# EAGLE board eDNA-SingleBoard-V3 (EAGLE 9.6.2)
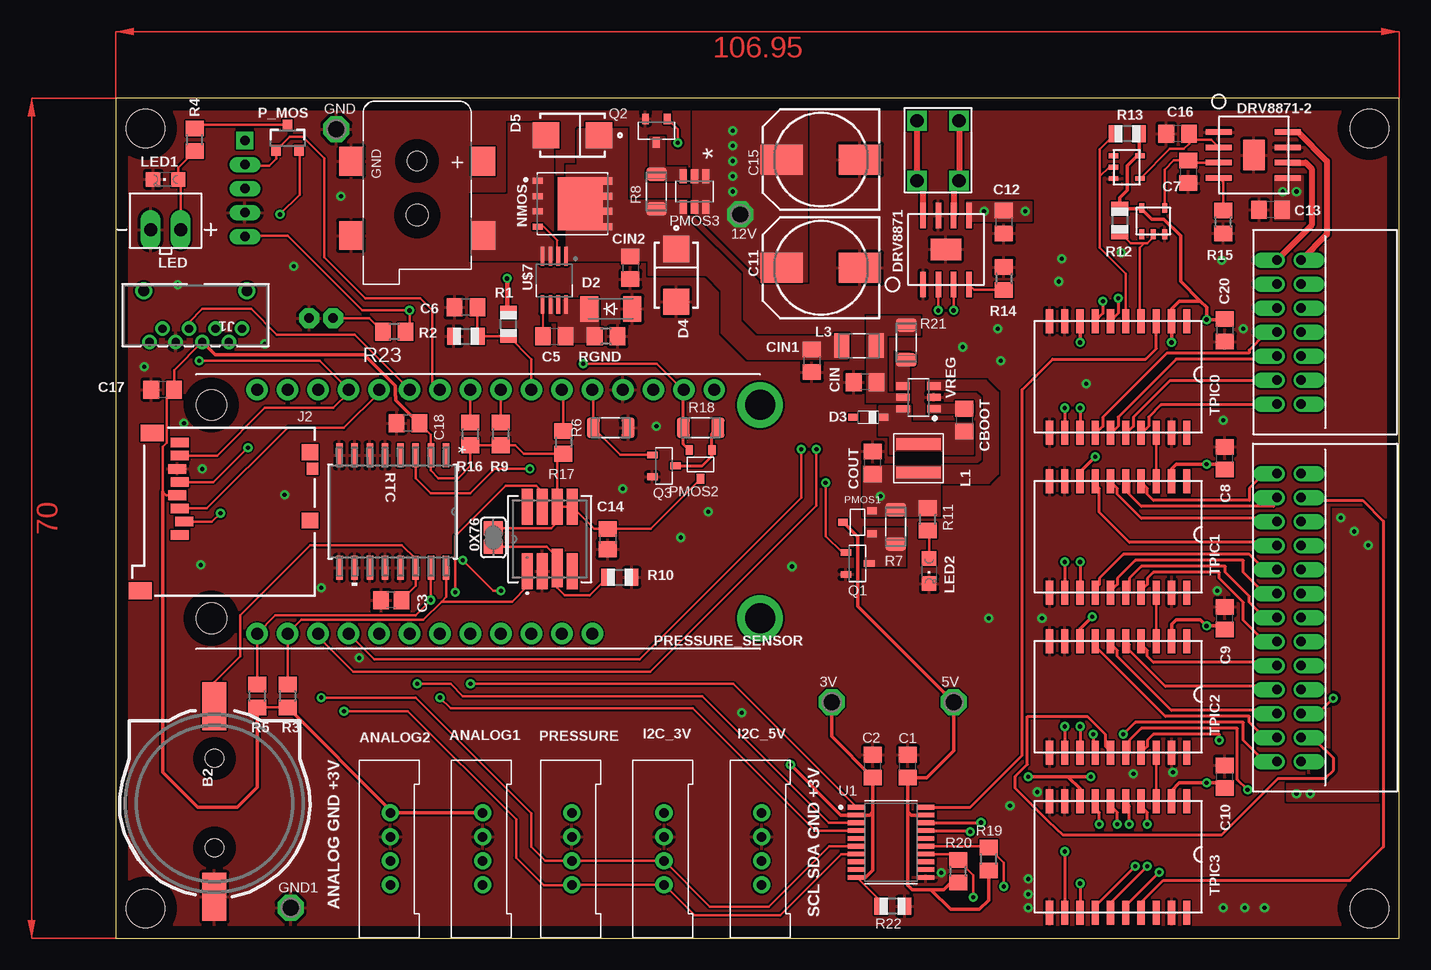
[diagram p0: board, top side]
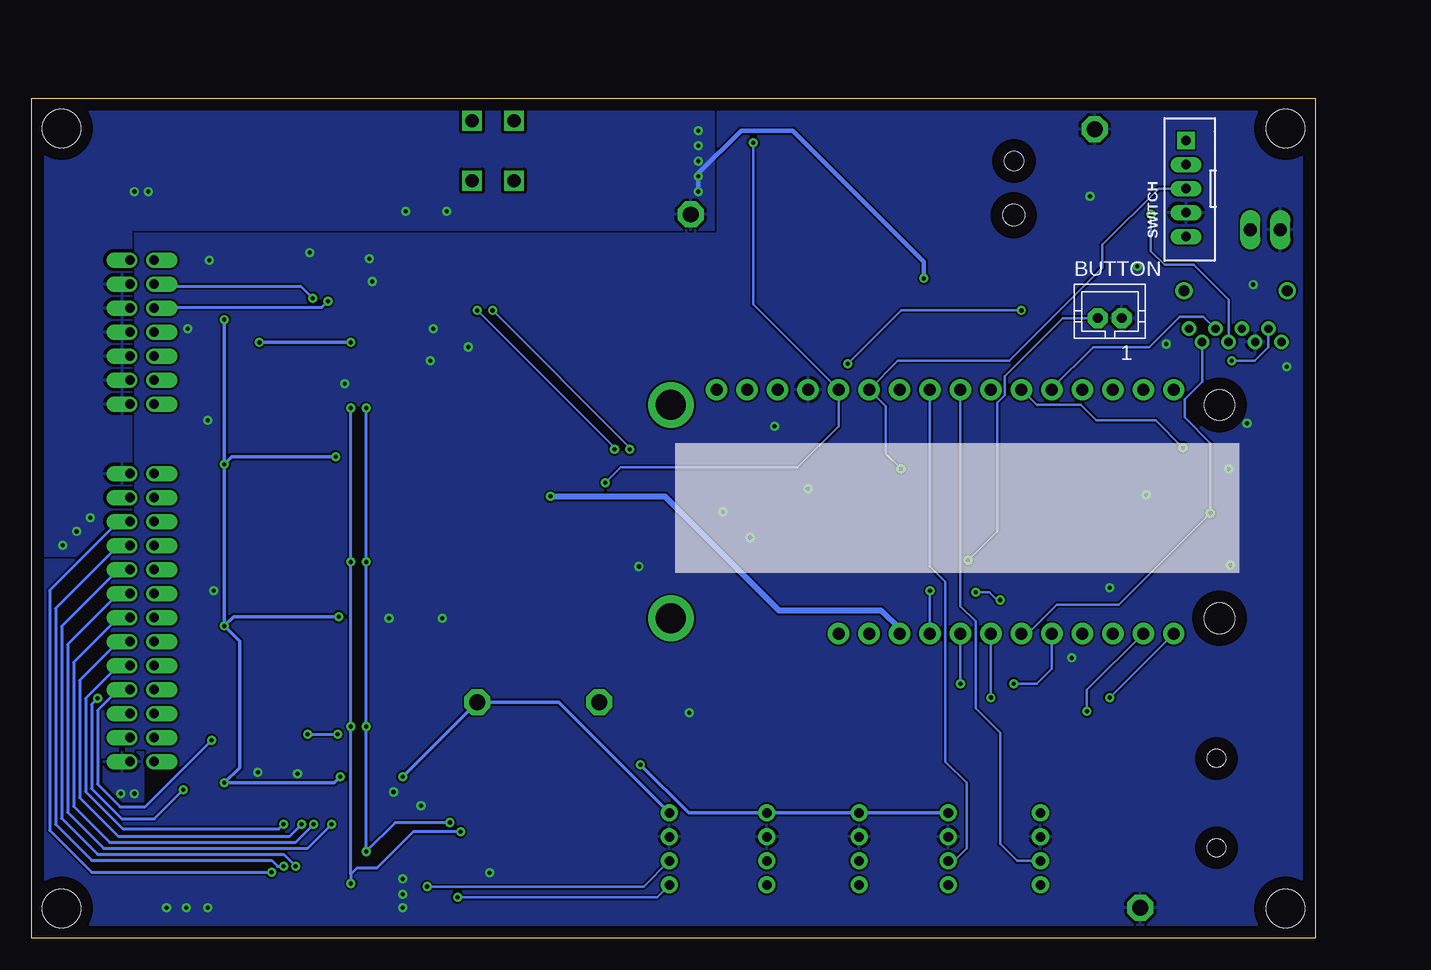
[diagram p1: board, bottom side, seen from below]

Size 106.95 x 70 mm. Coordinates in mm from the lower left corner, seen from the top.
Outline: 0,0 106.95,0 106.95,70 0,70 0,0
Copper layers (1*16): Top 0.035mm / dielectric 1.5mm / Bottom 0.035mm
Design rules "default *": minimum track width 6mil, minimum drill 0.35mm, track to track 6mil, track to pad 6mil, pad to pad 6mil, via to via 6mil, smd to smd 6mil, copper to edge 40mil, drill to drill 6mil, minimum pad ring 10mil, minimum via ring 8mil, stop-mask expansion 4mil, vias tented up to drill 35mil, thermal gap 10mil
Net classes: 1 12v: width 0.356 mm, clearance 0.254 mm; 2 HIGHVOLTAGE: clearance 0.3 mm; 3 sig: width 0.152 mm, clearance 0.2 mm
Holes 3.2 mm at 2.45,2.5 2.45,67.5 104.45,67.5 104.45,2.5

## Footprints (pad centres in the part's own frame; a part is rotated, then mirrored left to right if it is on the bottom)
SJ = smd 1.168 x 1.6: 1 -0.762,0; 2 0.762,0
P1-13 = drill 1.321 pad 2.159 octagon: TP 0,0
DCJACK_2MM_SMT = smd 2.4 x 2: GND 0,-5.5; GNDBREAK 6.2,-5.5; PWR1 0,5.5; PWR2 6.2,5.5 | hole 1.6: 0,0 | hole 1.8: 4.5,0
DF51-4POS = drill 0.8 pad 1.422: P$1 4.4,0; P$2 6.4,0; P$3 8.4,0; P$4 10.4,0
CR1220-2 = smd 4 x 2: + 8.29,0; - -7.6,0 | hole 1.5: 3.95,0; -3.5,0
JST-PH2 = drill 0.813 pad 1.676 octagon: 1 1,0; 2 -1,0
C0805 = smd 1.3 x 1.5: 1 -0.95,0; 2 0.95,0
C0805' = smd 1.3 x 1.5: 1 -0.85,0; 2 0.85,0
140CLH-0810 = smd 3.5 x 2.5: + 3.25,0; - -3.25,0
SOD-123_MINI-SMA = smd 1.5 x 2.1: A 1.8,0; C -1.8,0
SOD323_ST = smd 0.8 x 0.6: A 1.25,0; C -1.25,0
DO_214 = smd 2.2 x 2.15: A 2.2,0; C -2.2,0
SOP8 = smd 2.15 x 0.45: 1 -2.54,1.27; 2 -2.54,0; 3 -2.54,-1.27; 4 -2.54,-2.54; 5 3.21,-2.54; 6 3.21,-1.27; 7 3.21,0; 8 3.21,1.27 | smd 1.79 x 2.541: GND 0.381,-0.635
CONN_PJS008U-3000-0_YAM = drill 0.7 pad 1.1: 1 0,0; 2 1.092,1.092; 3 2.21,0; 4 3.302,1.092; 5 4.394,0; 6 5.512,1.092; 7 6.604,0; 8 7.696,1.092 | drill 0.9 pad 1.422: 9 -0.42,-3.175; 11 8.18,-3.175
GCT_MEM2051-00-195-00-A = smd 0.8 x 1.5: 1 1.94,-3.66; 2 0.84,-3.26; 3 -0.26,-3.66; 4 -1.36,-3.86; 5 -2.46,-3.66; 6 -3.56,-3.86; 7 -4.66,-3.66; 8 -5.76,-3.66 | smd 1 x 0.95: 9 -3.56,7.425 | smd 1.3 x 1.4: P1 -4.95,7.2; P2 0.75,7.2 | smd 1.4 x 1.9: P3 6.6,-6.95; P4 -6.55,-5.95
WE-MAPI_40XX = smd 0.98 x 3.7: 1 -1.185,0; 2 1.185,0
INDC3218X200N = smd 1.24 x 2.02: 1 -1.44,0; 2 1.44,0
JST_2POS_2.5MM_UP = drill 1.1 long: 1 -1.25,0; 2 1.25,0
CHIPLED_0805 = smd 1.2 x 1.2: A 0,-1.05; C 0,1.05
FEATHERWING = drill 1 pad 1.778: 1 6.35,1.27; 2 8.89,1.27; 3 11.43,1.27; 4 13.97,1.27; 5 16.51,1.27; 6 19.05,1.27; 7 21.59,1.27; 8 24.13,1.27; 9 26.67,1.27; 10 29.21,1.27; 11 31.75,1.27; 12 34.29,1.27; 13 36.83,1.27; 14 39.37,1.27; 15 41.91,1.27; 16 44.45,1.27; 17 44.45,21.59; 18 41.91,21.59; 19 39.37,21.59; 20 36.83,21.59; 21 34.29,21.59; 22 31.75,21.59; 23 29.21,21.59; 24 26.67,21.59; 25 24.13,21.59; 26 21.59,21.59; 27 19.05,21.59; 28 16.51,21.59 | drill 2.5 pad 3.81: P$1 2.54,20.32; P$2 2.54,2.54 | hole 2.54: 48.26,20.32; 48.26,2.54
8-POWERTDFN = smd 0.85 x 0.5: 1 -2.9,1.905; 2 -2.9,0.635; 3 -2.9,-0.635; 4 -2.9,-1.905 | smd 0.8 x 0.6: 5 2.925,-1.905; 6 2.925,-0.635; 7 2.925,0.635; 8 2.925,1.905 | smd 3.75 x 4.41: 9 0.65,0
SOT753 = smd 0.8 x 0.4: 1 -1.14,0.95; 2 -1.14,0; 3 -1.14,-0.95; 4 1.06,-0.95; 5 1.06,0.95
SOT23-3 = smd 0.8 x 0.9: 1 -0.95,-1; 2 0.95,-1; 3 0,1.1
SOT-23-3 = smd 0.8 x 0.6: D 1.2,0; G -1.2,0.95; S -1.2,-0.95
SOT23-6 = smd 1.146 x 0.597: 1 -1.287,0.95; 2 -1.287,0; 3 -1.287,-0.95; 4 1.287,-0.95; 5 1.287,0; 6 1.287,0.95
MS5803-02BA01 = smd 3 x 0.889: 1 -2.675,1.875; 2 -2.675,0.625; 4 -2.675,-1.875; 5 2.675,-1.875; 6 2.675,-0.625; 7 2.675,0.625; 8 2.675,1.875 | smd 3.2 x 0.889: 3 -2.408,-0.625
SOT23-S = smd 0.88 x 0.569: 1 -0.975,0.915; 2 -0.975,-0.915; 3 0.975,0
R0805 = smd 1.1 x 1.4: 1 -1,0; 2 1,0
R0805' = smd 1.3 x 1.5: 1 -0.95,0; 2 0.95,0
RES_1206 = smd 1.08 x 1.68: 1 -1.445,0; 2 1.445,0
21-0042B_16 = smd 1.981 x 0.533: 1 -4.686,4.445; 2 -4.686,3.175; 3 -4.686,1.905; 4 -4.686,0.635; 5 -4.686,-0.635; 6 -4.686,-1.905; 7 -4.686,-3.175; 8 -4.686,-4.445; 9 4.686,-4.445; 10 4.686,-3.175; 11 4.686,-1.905; 12 4.686,-0.635; 13 4.686,0.635; 14 4.686,1.905; 15 4.686,3.175; 16 4.686,4.445
2MM_5POS_HEADER = drill 0.8 pad 1.422 square: 1 -4,0 | drill 0.8 long: 2 -2,0; 3 0,0; 4 2,0; 5 4,0
DIP20 = smd 2 x 0.6: 1 -3.81,5.08; 2 -3.81,3.81; 3 -3.81,2.54; 4 -3.81,1.27; 5 -3.81,0; 6 -3.81,-1.27; 7 -3.81,-2.54; 8 -3.81,-3.81; 9 -3.81,-5.08; 10 -3.81,-6.35; 11 5.49,-6.35; 12 5.49,-5.08; 13 5.49,-3.81; 14 5.49,-2.54; 15 5.49,-1.27; 16 5.49,0; 17 5.49,1.27; 18 5.49,2.54; 19 5.49,3.81; 20 5.49,5.08
SOP65P640X120-20N = smd 1.57 x 0.41: 1 -2.87,2.925; 2 -2.87,2.275; 3 -2.87,1.625; 4 -2.87,0.975; 5 -2.87,0.325; 6 -2.87,-0.325; 7 -2.87,-0.975; 8 -2.87,-1.625; 9 -2.87,-2.275; 10 -2.87,-2.925; 11 2.87,-2.925; 12 2.87,-2.275; 13 2.87,-1.625; 14 2.87,-0.975; 15 2.87,-0.325; 16 2.87,0.325; 17 2.87,0.975; 18 2.87,1.625; 19 2.87,2.275; 20 2.87,2.925
3.5MM_DIP2 = drill 1.1 square: 1 -1.778,2.611; 2 -1.778,-2.389; 3 1.722,-2.389; 4 1.722,2.611
DF51K-26DP-2DS-ANGLE = drill 0.8 pad 1.118 offset: 1 0,-2; 2 2,-2; 3 4,-2; 4 6,-2; 5 8,-2; 6 10,-2; 7 12,-2; 8 14,-2; 9 16,-2; 10 18,-2; 11 20,-2; 12 22,-2; 13 24,-2; 14 24,0; 15 22,0; 16 20,0; 17 18,0; 18 16,0; 19 14,0; 20 12,0; 21 10,0; 22 8,0; 23 6,0; 24 4,0; 25 2,0; 26 0,0
DF51K-14DP-2DS-ANGLE = drill 0.8 pad 1.118 offset: 1 0,-2; 2 2,-2; 3 4,-2; 4 6,-2; 5 8,-2; 6 10,-2; 7 12,-2; 8 12,0; 9 10,0; 10 8,0; 11 6,0; 12 4,0; 13 2,0; 14 0,0
SOP65P640X120-8N = smd 1.57 x 0.41: 1 -2.87,0.975; 2 -2.87,0.325; 3 -2.87,-0.325; 4 -2.87,-0.975; 5 1.17,-0.975; 6 1.17,-0.325; 7 1.17,0.325; 8 1.17,0.975
SOT23-6@1 = smd 1.146 x 0.597: 1 -1.287,0.95; 2 -1.287,0; 3 -1.287,-0.95; 4 1.287,-0.95; 5 1.287,0; 6 1.287,0.95

## Placement (x,y rotation side)
0X76  [SJ]  31.45,33.4 90 top
3V  TPPAD1-13  [P1-13]  59.64,19.68 0 top
5V  TPPAD1-13  [P1-13]  69.8,19.68 0 top
12V  TPPAD1-13  [P1-13]  52.02,60.33 0 top
12V_IN  2.1MMJACKSMT  [DCJACK_2MM_SMT]  25.1,64.77 270 top
ANALOG1  DF51-4POS  [DF51-4POS]  30.56,14.86 270 top
ANALOG2  DF51-4POS  [DF51-4POS]  22.88,14.86 270 top
B2  cr1220  [CR1220-2]  8.21,11.05 90 top
BUTTON  [JST-PH2]  17.1,51.69 0 bottom
C1  100nF  [C0805]  65.99,14.35 90 top
C2  100nF  [C0805]  63.07,14.35 90 top
C3  0.1uF  [C0805']  22.94,28.19 180 top
C5  100nF  [C0805]  36.53,50.16 0 top
C6  100nF  [C0805]  29.16,52.58 180 top
C7  150pF  [C0805]  89.36,63.88 270 top
C8  100nF  [C0805]  92.41,40.01 90 top
C9  100nF  [C0805]  92.41,26.67 90 top
C10  100nF  [C0805]  92.41,13.46 90 top
C11  470uF  [140CLH-0810]  58.76,55.88 180 top
C12  100nF  [C0805]  73.99,59.69 270 top
C13  100nF  [C0805]  96.22,60.71 180 top
C14  100nF  [C0805']  40.98,33.27 270 top
C15  470uF  [140CLH-0810]  58.76,64.9 180 top
C16  150pF  [C0805]  88.47,67.06 180 top
C17  100nF  [C0805]  3.89,45.72 180 top
C18  100nF  [C0805]  24.34,42.93 180 top
C20  100nF  [C0805]  92.41,50.67 270 top
CBOOT  100nF  [C0805]  70.69,43.18 270 top
CIN  10uF  [C0805]  62.44,46.35 180 top
CIN1  10uF  [C0805]  57.99,48.13 270 top
CIN2  10uF  [C0805]  42.88,55.88 270 top
COUT  47uF  [C0805]  63.07,39.62 90 top
D2  1N4148W  [SOD-123_MINI-SMA]  41.23,52.45 0 top
D3  NSR0320MW2T1G  [SOD323_ST]  62.69,43.43 180 top
D4  SMAJ60A  [DO_214]  46.69,55.24 270 top
D5  SMAJ60A  [DO_214]  38.05,66.93 180 top
DRV8871  Motor H-Bridge  [SOP8]  68.53,57.02 90 top
DRV8871-2  Latch H  [SOP8]  94.44,65.91 0 top
GND  TPPAD1-13  [P1-13]  18.37,67.44 0 top
GND1  TPPAD1-13  [P1-13]  14.56,2.54 0 top
I2C_3V  DF51-4POS  [DF51-4POS]  45.67,14.86 270 top
I2C_5V  DF51-4POS  [DF51-4POS]  53.8,14.86 270 top
J1  PJS008U-3000-0  [CONN_PJS008U-3000-0_YAM]  10.5,50.8 180 top
J2  MEM2051-00-195-00-A  [GCT_MEM2051-00-195-00-A]  8.97,35.56 270 top
L1  10UH 2.7A  [WE-MAPI_40XX]  66.88,40.01 270 top
L3  LB3218T1R0M  [INDC3218X200N]  61.93,49.4 0 top
LED  2.5MM_JST_UP_2POS  [JST_2POS_2.5MM_UP]  4.14,59.05 0 top
LED1  Yellow  [CHIPLED_0805]  4.14,63.25 90 top
LED2  RED  [CHIPLED_0805]  67.77,30.61 180 top
MS1  FEATHERWING  [FEATHERWING]  56.22,46.99 180 top
NMOS  FDMS86101  [8-POWERTDFN]  38.05,61.21 0 top
NOTGATE1  [SOT753]  86.44,59.82 90 top
NOTGATE2  [SOT753]  84.28,64.26 0 top
P_MOS  130mA/20V  [SOT23-3]  14.31,66.67 0 top
PMOS1  DMP3099L-7  [SOT-23-3]  61.8,34.67 180 top
PMOS2  DMP3099L-7  [SOT-23-3]  48.72,39.5 270 top
PMOS3  DMP3056LDM-7  [SOT23-6]  48.21,62.23 270 top
PRESSURE  DF51-4POS  [DF51-4POS]  37.99,14.86 270 top
PRESSURE_SENSOR  MS580302BA01-00  [MS5803-02BA01]  36.15,33.27 90 top
Q1  DMN65D8L-7  [SOT23-S]  61.8,31.24 0 top
Q2  DMN65D8L-7  [SOT23-S]  45.04,67.31 270 top
Q3  DMN65D8L-7  [SOT23-S]  45.67,39.37 0 top
R1  1M  [R0805]  32.72,51.18 90 top
R2  300k  [R0805]  29.16,50.16 0 top
R3  10K  [R0805']  14.31,20.19 270 top
R4  3k  [R0805']  6.56,66.55 90 top
R5  10K  [R0805']  11.77,20.19 270 top
R6  30k  [RES_1206]  41.23,42.55 0 top
R7  100k  [RES_1206]  64.98,34.29 90 top
R8  100k  [RES_1206]  45.04,62.23 270 top
R9  10K  [R0805']  32.09,42.04 90 top
R10  30K  [R0805]  41.99,30.1 0 top
R11  6.2k  [R0805']  67.64,34.92 90 top
R12  20K  [R0805]  83.65,59.82 270 top
R13  20K  [R0805]  84.28,67.06 180 top
R14  32K  [R0805']  73.99,54.99 270 top
R15  32K  [R0805']  92.28,59.69 90 top
R16  10K  [R0805']  29.55,42.04 90 top
R17  10K  [R0805']  37.29,41.34 270 top
R18  30k  [RES_1206]  48.72,42.55 180 top
R19  10K  [R0805']  72.72,6.6 90 top
R20  10K  [R0805']  70.18,5.59 90 top
R21  100k  [RES_1206]  65.87,49.66 90 top
R22  10K  [R0805]  64.72,2.67 180 top
R23  10K  [R0805']  23.2,50.55 180 top
RGND  1K  [R0805']  40.85,50.16 180 top
RTC  DS3231SNT&R  [21-0042B_16]  23.07,35.56 270 top
SWITCH  2MM_JST_PH_5POS  [2MM_5POS_HEADER]  10.75,62.48 270 bottom
TPIC0  TPIC6B596  [DIP20]  84.15,47.62 270 top
TPIC1  TPIC6B596  [DIP20]  84.15,34.29 270 top
TPIC2  TPIC6B596  [DIP20]  84.15,20.95 270 top
TPIC3  TPIC6B596  [DIP20]  84.15,7.62 270 top
U1  TXS0108EPWR  [SOP65P640X120-20N]  64.6,8 0 top
U$2  Motor Push In  [3.5MM_DIP2]  68.53,65.53 0 top
U$4  DF51K-26DP-2DS  [DF51K-26DP-2DS-ANGLE]  98.76,38.73 270 top
U$5  DF51K-14DP-2DS  [DF51K-14DP-2DS-ANGLE]  98.76,56.52 270 top
U$7  LTC4372  [SOP65P640X120-8N]  36.53,53.98 270 top
VREG  BUCK_REGULATORS  [SOT23-6@1]  66.88,45.09 180 top

## Library data of the parts
0X76 = jumper
3V 5V 12V GND GND1 = testpad
12V_IN C3 C11 C14 C15 LED1 LED2 MS1 R1 R2 R10 R12 R13 R22 = adafruit
ANALOG1 ANALOG2 I2C_3V I2C_5V PRESSURE = HiroseConnectors
B2 = microbuilder
BUTTON = jst-ph
C1 C2 C5-C10 C12 C13 C16-C18 C20 R4 R11 = resistor
CBOOT CIN CIN1 CIN2 COUT = rcl; SPICEPREFIX: C
D2 D4 D5 NMOS U$4 U$5 U$7 = Sampler-eDNA
D3 = diode
DRV8871 DRV8871-2 LED NOTGATE1 NOTGATE2 PMOS3 Q1-Q3 SWITCH TPIC0 TPIC1-TPIC3 U$2 VREG = eDNA
J1 = Sampler-eDNA; BUILT_BY: EMA_Anthony; COPYRIGHT: Copyright (C) 2018 Accelerated Designs. All rights reserved; MANUFACTURER_PART_NUMBER: PJS008U-3000-0; SOURCELIBRARY: Yamaichi_2019-10-11; VENDOR: Yamaichi
J2 = MEM2051-00-195-00-A; AVAILABILITY: In Stock; DESCRIPTION: 9 (8 + 1) Position Card Connector microSD Surface Mount, Right Angle Gold, 1.95mm profile, Normally open switch, Push push, Top mount; MF: Global Connector Technology; MP: MEM2051-00-195-00-A; PACKAGE: None; PRICE: None; PURCHASE-URL: https://pricing.snapeda.com/search/part/MEM2051-00-195-00-A/?ref=eda
L1 = EMCComponents (rev19e); WE-NUMBER: 74438357100/10uH
L3 = LB3218T1R0M; DESCRIPTION: 1µH Unshielded Wirewound Inductor 1.075A 60mOhm 1207 (3218 Metric); DIGI-KEY_PART_NUMBER: 587-2032-1-ND; MF: Taiyo Yuden; MP: LB3218T1R0M; PACKAGE: 3218 Taiyo Yuden; PURCHASE-URL: https://pricing.snapeda.com/search/part/LB3218T1R0M/?ref=eda
P_MOS = SparkFun-DiscreteSemi; PROD_ID: TRANS-11153
PMOS1 PMOS2 = M0_Power; PMOS: P-MOSFET
PRESSURE_SENSOR = eDNA; MANUFACTURER_PART_NUMBER: MS580302BA0100; VENDOR: TE Connectivity
R3 R5 R9 R14-R17 R19 R20 R23 RGND = rcl; SPICEPREFIX: R
R6-R8 R18 R21 = Resistor_Capacitor; CREATED_BY: PCBLayout.com; DIGIKEY_PART_NUMBER: WSLP-.05TR-ND; MANUFACTURER: Vishay Dale; MPN: WSLP1206R0500FEA; PACKAGE: SMD 1206
RTC = eDNA; MANUFACTURER_PART_NUMBER: DS3231SN#T&R; VENDOR: Maxim Integrated Products
U1 = TXS0108EPWR; AVAILABILITY: In Stock; DESCRIPTION: 8-bit bidirectional voltage-level shifter for open-drain and push-pull application; MF: Texas Instruments; MP: TXS0108EPWR; PACKAGE: TSSOP-20 Texas Instruments; PRICE: None; PURCHASE-URL: https://pricing.snapeda.com/search/part/TXS0108EPWR/?ref=eda

## Nets
3V_MCU: MS1.2 PMOS2.S R18.2 R23.1 SWITCH.5
5V_MCU: COUT.1 L1.2 MS1.26 PMOS1.S R7.2 R11.2 VREG.3
5V_SCL: I2C_5V.P$4 R20.2 U1.14
5V_SDA: I2C_5V.P$3 R19.2 U1.15
12V_IN: CIN1.1 CIN2.1 D4.C D5.C L3.1 NMOS.5 NMOS.6 NMOS.7 NMOS.8 NMOS.9 PMOS3.4 R8.2 U$7.1
+3V3: 0X76.2 3V.TP ANALOG1.P$1 ANALOG2.P$1 C2.1 C14.1 C17.1 C18.1 I2C_3V.P$1 J1.4 J2.4 P_MOS.2 PMOS2.D PRESSURE.P$1 PRESSURE_SENSOR.5 PRESSURE_SENSOR.6 R3.2 R5.2 R9.1 R16.1 R17.2 R22.2 RTC.2 U1.2 U1.10
+5V: 5V.TP C1.1 C8.1 C9.1 C10.1 C20.1 I2C_5V.P$1 NOTGATE1.5 NOTGATE2.5 PMOS1.D R12.1 R13.1 R19.1 R20.1 TPIC0.2 TPIC0.8 TPIC1.2 TPIC1.8 TPIC2.2 TPIC2.8 TPIC3.2 TPIC3.8 U1.19
+12V [12v]: 12V.TP C11.+ C12.1 C13.1 C15.+ DRV8871-2.5 DRV8871.5 PMOS3.1 PMOS3.2 PMOS3.5 PMOS3.6 R1.2 U$4.14 U$4.26 U$5.8 U$5.9 U$5.10 U$5.11 U$5.12 U$5.13
+12V_NON_PROTECT: 12V_IN.PWR2 D5.A NMOS.1 NMOS.2 NMOS.3 U$7.3 U$7.4
AIR: TPIC0.6 U$5.2
ALCOHOL: TPIC0.7 U$5.3
BATTERY_READ: C6.1 MS1.7 R1.1 R2.2
BUTTON1: BUTTON.2 MS1.25 R23.2
CS: J1.2 J2.2 MS1.22
DGND: 12V_IN.GND 12V_IN.GNDBREAK ANALOG1.P$2 ANALOG2.P$2 B2.- BUTTON.1 C1.2 C2.2 C3.2 C6.2 C7.2 C8.2 C9.2 C10.2 C11.- C12.2 C13.2 C14.2 C15.- C16.2 C17.2 C18.2 C20.2 CIN1.2 CIN2.2 CIN.2 COUT.2 D2.A D4.A DRV8871-2.1 DRV8871-2.7 DRV8871-2.GND DRV8871.1 DRV8871.7 DRV8871.GND GND1.TP GND.TP I2C_3V.P$2 I2C_5V.P$2 J1.6 J2.6 LED1.C LED2.C LED.1 MS1.4 NOTGATE1.3 NOTGATE2.3 PRESSURE.P$2 PRESSURE_SENSOR.2 Q1.2 Q2.2 Q3.2 R2.1 R6.2 R10.2 R14.1 R15.1 R22.1 RGND.1 RTC.5 RTC.6 RTC.7 RTC.8 RTC.9 RTC.10 RTC.11 RTC.12 RTC.13 SWITCH.4 TPIC0.9 TPIC0.10 TPIC0.11 TPIC0.19 TPIC1.9 TPIC1.10 TPIC1.11 TPIC1.19 TPIC2.9 TPIC2.10 TPIC2.11 TPIC2.19 TPIC3.9 TPIC3.10 TPIC3.11 TPIC3.19 U1.11 VREG.2
DI: J1.3 J2.3 MS1.12
DO: J1.7 J2.7 MS1.13
GND: D3.A
HB_IN1: DRV8871.2 MS1.20
HB_IN2: DRV8871.3 MS1.19
LATCH_H_BRIDGE2: C16.1 DRV8871-2.2 NOTGATE2.4
LATCH_H_BRIGDE1: C7.1 DRV8871-2.3 NOTGATE1.4
LATCHOUT1: DRV8871-2.8 U$5.14
LATCHOUT2: DRV8871-2.6 U$5.1
LATCHVALVE1: NOTGATE1.2 R12.2 TPIC0.4
LATCHVALVE2: NOTGATE2.2 R13.2 TPIC0.5
MOTOR1: DRV8871.8 U$2.1 U$2.2
MOTOR2: DRV8871.6 U$2.3 U$2.4
N$1: B2.+ C3.1 RTC.14
N$2: P_MOS.3 R4.2
N$3: PMOS3.3 Q2.3 R8.1
N$4: DRV8871.4 R14.2
N$5: DRV8871-2.4 R15.2
N$6: 0X76.1 PRESSURE_SENSOR.3 R10.1
N$8: NMOS.4 U$7.2
N$9: LED1.A LED.2 R4.1
N$10: PMOS1.G Q1.3 R7.1
N$11: LED2.A R11.1
N$12: R21.1 VREG.4
N$13: PMOS2.G Q3.3 R18.1
N$15: CIN.1 L3.2 R21.2 VREG.5
N$16: CBOOT.1 VREG.1
N$17: CBOOT.2 D3.C L1.1 VREG.6
N$18: C5.1 U$7.5
N$19: C5.2 D2.C RGND.2 U$7.6 U$7.8
RTC_INT: MS1.6 R17.1 RTC.3 SWITCH.3
S1: TPIC1.4 U$4.1
S2: TPIC1.5 U$4.2
S3: TPIC1.6 U$4.3
S4: TPIC1.7 U$4.4
S5: TPIC1.14 U$4.5
S6: TPIC1.15 U$4.6
S7: TPIC1.16 U$4.7
S8: TPIC1.17 U$4.8
S9: TPIC2.4 U$4.9
S10: TPIC2.5 U$4.10
S11: TPIC2.6 U$4.11
S12: TPIC2.7 U$4.12
S13: TPIC2.14 U$4.13
S14: TPIC2.15 U$4.15
S15: TPIC2.16 U$4.16
S16: TPIC2.17 U$4.17
S17: TPIC3.4 U$4.18
S18: TPIC3.5 U$4.19
S19: TPIC3.6 U$4.20
S20: TPIC3.7 U$4.21
S21: TPIC3.14 U$4.22
S22: TPIC3.15 U$4.23
S23: TPIC3.16 U$4.24
S24: TPIC3.17 U$4.25
SCK: J1.5 J2.5 MS1.11
SCL: I2C_3V.P$4 MS1.18 PRESSURE.P$4 PRESSURE_SENSOR.1 R3.1 RTC.16 U1.7
SDA: I2C_3V.P$3 MS1.17 PRESSURE.P$3 PRESSURE_SENSOR.7 R5.1 RTC.15 U1.6
SENSOR1: ANALOG1.P$3 MS1.8 R9.2
SENSOR2: ANALOG2.P$3 MS1.9 R16.2
SHIFT_CLK: MS1.23 U1.4
SHIFT_DATA: MS1.24 U1.1
SHIFT_LATCH: MS1.21 U1.3
SHUTDOWN: MS1.5 Q1.1 Q2.1 Q3.1 R6.1
T_DATA: TPIC0.3 U1.20
T_DATA1: TPIC0.18 TPIC1.3
T_DATA2: TPIC1.18 TPIC2.3
T_DATA3: TPIC2.18 TPIC3.3
T_RCK: TPIC0.12 TPIC1.12 TPIC2.12 TPIC3.12 U1.18
T_SCK: TPIC0.13 TPIC1.13 TPIC2.13 TPIC3.13 U1.17
TPIC0_4: TPIC0.14 U$5.4
TPIC0_5: TPIC0.15 U$5.5
TPIC0_6: TPIC0.16 U$5.6
TPIC0_7: TPIC0.17 U$5.7
WAKE_NOSLEEP: MS1.10 P_MOS.1 SWITCH.2

## Tracks (layer width: path | path; a pad name or v marks a point on that pad's centre or on a via)
3V_MCU  (via drill 0.35)
  Top 0.2: R23.1 24.46,50.87 v24.46,52.32 20.53,52.32 14.31,58.55 10.81,58.55 SWITCH.5 | v38.94,47.88 45.07,47.88 47.28,45.67
  Top 0.254: PMOS2.S 47.28,41.19 R18.2 47.28,45.67 MS1.2
  Bottom 0.2: v24.46,52.32 34.5,52.32 v38.94,47.88
5V_MCU  (via drill 0.35)
  Bottom 0.508: v63.71,36.83 54.18,36.83 44.66,27.3 36.15,27.3 34.62,25.78 MS1.26
  pour Top (no thermals): 68.66,39.37 68.66,35.18 62.31,35.18 62.31,39.37
  pour Top (no thermals): 67.64,45.72 71.84,45.72 72.34,45.21 72.34,39.75 71.96,39.37 67.39,39.37 67.39,37.97 72.72,37.97 73.49,38.73 73.49,45.47 72.47,46.48 67.64,46.48
5V_SCL  (via drill 0.35)
  Top 0.2: U1.14 69.7,7.03 R20.2 71.45,5.27 v71.45,3.43
  Bottom 0.2: v71.45,3.43 54.83,3.43 I2C_5V.P$4
5V_SDA  (via drill 0.35)
  Top 0.2: U1.15 72.6,7.68 R19.2 73.99,6.28 v73.99,4.32
  Bottom 0.2: v73.99,4.32 55.94,4.32 I2C_5V.P$3
12V_IN
  pour Top (no thermals): 37.55,56.52 47.45,56.52 47.58,56.64 47.58,61.47 42.63,61.47 42.63,67.44 38.56,67.44 38.44,67.31 38.44,64.39 37.55,64.39
  pour Top (no thermals): 44.4,59.56 47.83,59.56 52.02,55.37 52.02,51.44 53.29,50.16 60.91,50.16 60.91,48.26 52.66,48.26 50.5,50.42 50.5,53.98 49.23,55.24 44.4,55.24
+3V3  (via drill 0.35)
  Top 0.2: J1.4 4.84,47.36 C17.1 4.22,45.1 4.22,41.3 3.89,40.97 3.89,37.21 4.18,36.92 J2.4 | C18.1 26.24,41.97 RTC.2 26.24,38.99 26.88,38.35 28.53,38.35 29.55,39.37 R16.1 R9.1 33.29,41.09 33.99,40.39 R17.2 36.77,39.87 PRESSURE_SENSOR.6 | 0X76.2 36.28,34.16 36.77,34.66 PRESSURE_SENSOR.6 | PRESSURE_SENSOR.6 PRESSURE_SENSOR.5 39.85,34.12 C14.1 44.55,34.12 PMOS2.D | R5.2 R3.2 | U1.10 63.72,3.08 R22.2 | v13.67,60.33 15.32,61.98 15.32,65.61 P_MOS.2
  Top 0.305: J1.4 8.26,48.64 20.69,48.64 23.27,46.06 23.27,45.23 23.32,45.17 23.32,44.83 25.23,42.93 C18.1 | R3.2 22.88,10.67 ANALOG2.P$1 ANALOG1.P$1 | 3V.TP 59.64,16.83 C2.1 63.07,10.54 | 63.07,10.54 62.81,10.28 U1.2 60.42,10.28 v56.22,14.48 | U1.10 61.74,5.09 62.48,5.09 63.07,5.68 63.07,10.54 | R5.2 11.77,12.57 10.11,10.92 6.81,10.92 3.89,13.84 3.89,37.21
  Bottom 0.2: J1.4 7.19,53.21 10.11,56.13 12.53,56.13 13.67,57.28 v13.67,60.33
  Bottom 0.305: ANALOG1.P$1 PRESSURE.P$1 I2C_3V.P$1 52.2,10.46 v56.22,14.48
+5V  (via drill 0.35)
  Top 0.305: PMOS1.D 61.8,33.47 61.8,27.69 5V.TP 69.8,15.62 67.58,13.4 C1.1 65.99,10.54 | 65.99,10.54 66.26,10.28 U1.19 | C10.1 91.97,12.95 v90.89,12.95 88.6,12.95 87.96,12.32 TPIC3.2 | C9.1 92.09,26.04 v90.89,26.04 90.38,26.54 88.35,26.54 87.96,26.16 TPIC2.2 | C8.1 91.97,39.5 v90.89,39.5 88.35,39.5 87.96,39.12 TPIC1.2 | C20.1 92.35,51.56 v90.89,51.56 90.89,52.58 90.38,53.09 | 90.38,53.09 88.6,53.09 87.96,52.45 TPIC0.2 v87.96,49.66 | 90.38,53.09 88.73,54.74 88.73,58.55 87.33,59.94 86.31,59.94 85.49,60.77 NOTGATE1.5 85.43,60.82 R12.1 83.65,61.72 84.28,62.36 84.28,64.39 85.1,65.21 NOTGATE2.5 85.28,65.27 R13.1 | v76.03,13.46 79.33,13.46 | 79.33,13.46 v81.23,13.46 | 79.33,13.46 80.34,12.45 TPIC3.8 | 65.99,10.54 65.99,4.45 66.38,4.06 67.9,4.06 | 67.9,4.06 68.98,4.06 69.55,4.64 R20.1 | 67.9,4.06 69.55,2.41 71.96,2.41 72.72,3.17 R19.1 | TPIC0.8 v80.34,49.66 | v81.61,40.13 80.34,38.86 TPIC1.8 | v81.36,26.8 80.34,25.78 TPIC2.8
  Bottom 0.305: v90.89,26.04 89.62,24.77 89.62,14.22 v90.89,12.95 81.74,12.95 v81.23,13.46 | v90.89,26.04 v90.89,39.5 | v90.89,39.5 v90.89,51.56 | I2C_5V.P$1 63.03,19.68 5V.TP v76.03,13.46 | v80.34,49.66 v87.96,49.66 | v90.89,39.5 90.25,40.13 v81.61,40.13 | v90.89,26.04 90.12,26.8 v81.36,26.8
+12V  (via drill 0.35)
  Top 0.356: v32.59,54.99 32.59,52.31 R1.2
  Bottom 0.356: v51.39,62.23 51.39,63.75 47.83,67.31 43.52,67.31 32.59,56.39 v32.59,54.99
  other vias: 51.39,67.31 51.39,66.04 51.39,64.77 51.39,63.5 72.34,60.58 75.77,60.58 97.24,62.23 98.38,62.23 102.06,35.05 103.2,33.91 104.35,32.77 99.52,12.06 98.38,12.06
  pour Top (no thermals): 48.21,60.45 53.93,54.74 57.61,54.74 57.61,69.98 48.09,69.98 48.09,60.58
  pour Bottom: 50.12,59.05 50.12,69.85 106.89,69.85 106.89,31.88 98.63,31.88 98.63,59.05
  pour Top (no thermals): 76.28,59.82 70.95,59.82 70.95,61.34 76.28,61.34
  pour Top (no thermals): 96.6,59.94 96.6,63.5 98.89,63.5 98.89,59.94
  pour Top: 101.43,35.81 106.89,35.81 106.89,11.43 97.62,11.43 97.62,13.97 101.43,13.97
  pour Bottom: 97.62,11.43 97.62,15.49 101.05,15.49 101.05,11.43
+12V_NON_PROTECT
  pour Top (no thermals): 36.4,56.52 29.67,56.52 29.67,61.98 32.59,61.98 32.72,62.1 32.72,67.94 36.4,67.94
AIR  (via drill 0.35)
  Top 0.254: TPIC0.6 83.52,52.07 v83.52,53.34
  Bottom 0.254: v83.52,53.34 84.54,54.36 96.73,54.36 U$5.2
ALCOHOL  (via drill 0.35)
  Top 0.254: TPIC0.7 82.25,52.07 v82.25,53.09
  Bottom 0.254: v82.25,53.09 82.76,52.58 96.73,52.58 U$5.3
BATTERY_READ
  Top 0.2: C6.1 30.11,50.22 R2.2 30.18,50.18 R1.1 34.62,48.28 MS1.7
BUTTON1  (via drill 0.35)
  Top 0.2: v28.91,31.5 31.45,28.96 v32.09,28.96 | BUTTON.2 21.1,51.69 R23.2
  Bottom 0.2: BUTTON.2 21.04,51.69 25.86,46.86 25.86,45.25 26.5,44.61 26.5,33.91 v28.91,31.5 | v32.09,28.96 MS1.25
CS  (via drill 0.35)
  Top 0.2: v8.72,35.43 8,34.72 J2.2
  Bottom 0.2: J1.2 9.4,46.38 10.85,44.93 10.85,43.41 8.72,41.27 v8.72,35.43 16.34,27.81 21.51,27.81 23.92,25.4 MS1.22
DGND  (via drill 0.35)
  other vias: 88.09,13.84 14.05,36.96 2.37,47.62 5.16,54.48 14.81,56.01 18.75,61.85 7.19,39.12 7.07,31.11 76.03,2.54 76.03,3.68 76.03,4.95 92.28,2.54 94.06,2.54 95.71,2.54 77.17,26.67 72.72,26.67 91.77,28.96 92.28,43.18 80.85,46.23 73.74,48.13 73.49,50.8 70.57,49.28 78.57,54.74 78.82,56.64 92.16,56.52 93.93,50.8 56.34,30.99 49.36,35.56 47.07,33.4 42.24,37.47 45.04,42.67 17.1,29.21 74.5,11.05 76.79,12.19 68.79,5.46 52.15,18.8 12.4,49.53 5.67,42.93 20.27,23.37 83.77,57.15 84.79,13.72
  pour Top (rank 2): -1.95,-1.27 -1.95,72.39 109.81,72.39 109.81,-1.27
  pour Bottom (rank 2): -3.22,73.66 -3.22,-2.41 110.95,-2.41 110.95,73.66
DI
  Top 0.2: MS1.12 21.93,45.47 19,42.55 14.31,42.55 7.58,35.82 J2.3
  Bottom 0.2: J1.3 9.3,51.82 11.26,51.82 13.8,49.28 18.5,49.28 21.93,45.85 MS1.12
DO  (via drill 0.35)
  Top 0.2: J2.7 8.42,40.22 12.4,44.2 18.12,44.2 19.39,45.47 MS1.13 16.97,48.13 v6.94,48.13
  Bottom 0.2: v6.94,48.13 5.03,48.13 3.89,49.28 J1.7
HB_IN1  (via drill 0.35)
  Top 0.2: DRV8871.2 v68.53,52.32 | v57.1,40.77 57.1,36.7 43.64,23.24 21.54,23.24 MS1.20
  Bottom 0.2: v68.53,52.32 57.1,40.89 v57.1,40.77
HB_IN2  (via drill 0.35)
  Top 0.2: DRV8871.3 v69.8,52.32 | v58.37,40.77 58.37,36.07 44.53,22.23 19.77,22.23 16.84,25.15 MS1.19
  Bottom 0.2: v69.8,52.32 58.37,40.89 v58.37,40.77
LATCH_H_BRIDGE2
  Top 0.2: NOTGATE2.4 87.82,65.79 88.98,65.79 89.42,66.23 C16.1 89.93,66.55 91.27,66.55 DRV8871-2.2
LATCH_H_BRIGDE1
  Top 0.2: DRV8871-2.3 89.55,64.64 C7.1 88.15,64.83 87.39,64.07 NOTGATE1.4
LATCHOUT1
  Top 0.508: DRV8871-2.8 98.51,67.18 100.92,64.77 100.92,58.67 U$5.14
LATCHOUT2
  Top 0.508: DRV8871-2.6 99.14,64.64 99.65,64.14 99.65,59.44 96.76,56.55 U$5.1
LATCHVALVE1
  Top 0.2: R12.2 84.55,57.91 85.68,57.91 | 85.68,57.91 85.93,57.91 86.44,58.42 NOTGATE1.2 | 85.68,57.91 85.3,57.53 85.3,51.56 TPIC0.4
LATCHVALVE2
  Top 0.2: TPIC0.5 84.15,55.37 82,57.53 82,63.5 | 82,63.5 82.76,64.26 NOTGATE2.2 | 82,63.5 82,65.77 R13.2
MOTOR1
  Top 0.508: DRV8871.8 67.26,62.63 U$2.2 U$2.1
MOTOR2
  Top 0.508: U$2.4 U$2.3 69.8,62.69 DRV8871.6
N$1
  Top 0.2: C3.1 24.97,29.38 RTC.14 24.97,31.62 23.83,32.77 16.21,32.77 10.37,26.92 10.37,23.5 8.21,21.34 B2.+
N$2
  Top 0.2: R4.2 6.88,67.82 14.26,67.82 P_MOS.3
N$3
  pour Top (no thermals): 47.45,63.12 44.53,63.12 44.53,66.8 45.67,66.8 45.67,64.26 47.45,64.26
N$4
  Top 0.2: DRV8871.4 71.52,54.04 R14.2
N$5
  Top 0.2: DRV8871-2.4 92.28,62.99 R15.2
N$6
  Top 0.2: R10.1 39.47,28.57 37.42,28.57 36.77,29.22 PRESSURE_SENSOR.3 36.77,31.76 35.9,32.64 0X76.1
N$8
  Top 0.152: U$7.2 36.78,56.92 36.78,58.17 35.64,59.31 NMOS.4
N$9
  Top 0.2: LED.2 5.39,63.05 LED1.A 5.19,64.23 R4.1
N$10
  pour Top (no thermals): 65.74,34.16 65.74,30.99 62.44,30.99 62.44,34.16
N$11
  Top 0.2: LED2.A 67.77,33.85 R11.1
N$12
  pour Top (no thermals): 66.12,45.72 66.12,48.77 64.98,48.77 64.98,45.72
N$13
  Top 0.254: Q3.3 48.85,39.37 49.67,40.19 PMOS2.G 49.67,42.05 R18.1
N$15
  pour Top (no thermals): 66.12,45.34 64.22,45.34 64.22,50.29 67.01,50.29 67.01,51.82 62.56,51.82 62.56,44.7 66.12,44.7
N$16
  pour Top (no thermals): 67.64,43.81 71.45,43.81 71.45,44.45 67.64,44.45
N$17
  pour Top (no thermals): 71.45,42.93 66.25,42.93 66.25,44.32 63.58,44.32 63.58,41.91 64.47,41.91 64.47,40.39 71.45,40.39
N$18
  Top 0.152: U$7.5 35.55,50.19 C5.1
N$19
  pour Top (no thermals): 36.91,49.66 36.91,51.44 36.15,51.44 36.15,53.21 40.21,53.21 40.21,49.66
RTC_INT  (via drill 0.35)
  Top 0.2: R17.1 37.29,45.59 MS1.6 | RTC.3 24.97,38.35 26.24,37.08 29.55,37.08 31.58,39.12 v34.5,39.12
  Bottom 0.2: v34.5,39.12 35.77,40.39 35.77,44.32 MS1.6 34.75,48.13 25.48,48.13 17.73,55.88 17.73,57.78 13.04,62.48 SWITCH.3
S1
  Top 0.254: TPIC1.4 85.45,38 85.95,37.5 85.95,37 86.45,36.5 94.45,36.5 94.45,37.5 95.45,38.5 96.45,38.5 U$4.1
S2
  Top 0.254: TPIC1.5 84.45,38 84.45,37 85.45,36 96.45,36 96.45,36.5 U$4.2
S3
  Top 0.254: TPIC1.6 82.95,38 83.45,37.5 83.45,37 85.45,35 96.45,35 U$4.3
S4
  Top 0.254: TPIC1.7 81.45,38 81.95,37.5 81.95,35.5 84.45,33 96.45,33 U$4.4
S5
  Top 0.254: TPIC1.14 81.45,29 81.95,29.5 81.95,30 83.95,32 94.45,32 95.45,31 96.45,31 U$4.5
S6
  Top 0.254: TPIC1.15 82.95,29 83.45,29.5 83.45,30 84.95,31.5 93.95,31.5 93.95,30.5 95.45,29 96.45,29 U$4.6
S7
  Top 0.254: TPIC1.16 84.45,29 84.45,30 85.45,31 92.45,31 92.45,30.5 94.45,28.5 94.45,28 95.45,27 96.45,27 U$4.7
S8
  Top 0.254: TPIC1.17 85.45,29 85.95,29.5 85.95,30 86.45,30.5 91.95,30.5 91.95,30 93.95,28 93.95,26.5 95.45,25 96.45,25 U$4.8
S9
  Top 0.254: TPIC2.4 85.45,24.5 85.95,24 85.95,23.5 86.45,23 96.45,23 U$4.9
S10
  Top 0.254: TPIC2.5 84.45,24.5 84.45,24 87.45,21 96.45,21 U$4.10
S11
  Top 0.254: TPIC2.6 82.95,24.5 83.45,24 83.45,23.5 87.95,19 96.45,19 U$4.11
S12
  Top 0.254: TPIC2.7 81.45,24.5 87.45,18.5 94.45,18.5 94.45,18 95.45,17 96.45,17 U$4.12
S13  (via drill 0.35)
  Top 0.254: v81.45,17 81.45,15.5 TPIC2.14 | v83.95,17 84.95,18 93.95,18 93.95,16.5 95.45,15 96.45,15 U$4.13
  Bottom 0.254: v83.95,17 v81.45,17
S14
  Top 0.254: TPIC2.15 82.95,15.5 82.45,16 82.45,17 80.95,18.5 75.95,18.5 75.95,14.5 74.95,13.5 74.95,12.5 77.68,9.77 78.89,8.64 92.16,8.64 96.85,13.33 100.78,13.33 101.48,14.02 101.46,14.99 99.95,16.5 98.95,16.5 U$4.15
S15  (via drill 0.35)
  Top 0.254: v94.3,12.37 93.45,13.22 93.45,17.5 85.45,17.5 84.45,16.5 84.45,15.5 TPIC2.16 | v101.45,20 100.45,19 98.95,19 U$4.16
  Bottom 0.254: v94.3,12.37 96.72,9.96 99.44,9.96 101.95,12.48 101.95,19.5 v101.45,20
S16  (via drill 0.35)
  Top 0.254: v91.95,16.5 91.95,17 86.45,17 85.95,16.5 85.95,16 85.45,15.5 TPIC2.17
  Bottom 0.254: v91.95,16.5 97.49,10.96 99.56,10.96 101.45,12.85 101.45,19 99.95,20.5 98.95,20.5 U$4.17
S17  (via drill 0.35)
  Top 0.254: v85.95,9.5 85.95,10.5 85.45,11 TPIC3.4
  Bottom 0.254: v85.95,9.5 86.33,9.12 99.34,9.12 102.45,12.23 102.45,20 99.95,22.5 98.95,22.5 U$4.18
S18  (via drill 0.35)
  Top 0.254: v84.45,9.5 84.45,11 TPIC3.5
  Bottom 0.254: v84.45,9.5 85.45,8.5 99.72,8.5 102.95,11.73 102.95,21.5 99.95,24.5 98.95,24.5 U$4.19
S19  (via drill 0.35)
  Top 0.254: v83.45,9.5 83.45,10.5 82.95,11 TPIC3.6
  Bottom 0.254: v83.45,9.5 84.95,8 100.45,8 103.45,11 103.45,23 99.95,26.5 98.95,26.5 U$4.20
S20  (via drill 0.35)
  Top 0.254: v81.95,9.5 81.95,10.5 81.45,11 TPIC3.7
  Bottom 0.254: v81.95,9.5 83.95,7.5 100.95,7.5 103.95,10.5 103.95,24.5 99.95,28.5 98.95,28.5 U$4.21
S21  (via drill 0.35)
  Top 0.254: v84.95,6 81.45,2.5 TPIC3.14
  Bottom 0.254: v84.95,6 85.95,7 101.45,7 104.45,10 104.45,26 99.95,30.5 98.95,30.5 U$4.22
S22  (via drill 0.35)
  Top 0.254: v85.95,6 82.95,2.99 82.95,2.46 TPIC3.15
  Bottom 0.254: v85.95,6 86.45,6 86.95,6.5 101.95,6.5 104.95,9.5 104.95,27.5 99.95,32.5 98.95,32.5 U$4.23
S23  (via drill 0.35)
  Top 0.254: v86.95,5.5 84.2,2.75 84.2,2.19 TPIC3.16
  Bottom 0.254: v86.95,5.5 101.95,5.5 105.45,9 105.45,29 99.95,34.5 98.95,34.5 U$4.24
S24
  Top 0.254: U$4.25 98.95,36.5 103.89,36.5 105.63,34.76 105.63,7.62 102.83,4.83 87.28,4.83 85.45,2.99 85.45,2.15 TPIC3.17
SCK  (via drill 0.35)
  Top 0.2: MS1.11 19.89,50.29 13.42,50.29 11.26,52.45 7.19,52.45 6.1,51.36 J1.5 | v11,40.89 8.13,38.02 J2.5
  Bottom 0.2: MS1.11 23.2,44.45 19.51,44.45 18.24,43.18 13.29,43.18 v11,40.89
SCL  (via drill 0.35)
  Top 0.2: R3.1 MS1.18 15.45,26.54 25.61,26.54 27.13,28.07 | 27.13,28.07 27.51,28.45 RTC.16 | 27.13,28.07 33.01,28.07 34.27,29.33 PRESSURE_SENSOR.1 | v19,18.92 24.34,18.92 33.36,9.91 33.36,6.73 35.64,4.45 37.98,4.45 PRESSURE.P$4 I2C_3V.P$4 48.21,1.92 55.34,1.92 60.45,7.03 U1.7
  Bottom 0.2: MS1.18 19,20.7 v19,18.92
SDA  (via drill 0.35)
  Top 0.2: R5.1 MS1.17 13.29,26.92 24.97,26.92 v26.24,28.19 RTC.15 | PRESSURE_SENSOR.7 35.52,37.2 35.01,37.72 32.47,37.72 28.28,33.53 v28.28,28.83 | v17.1,20.07 24.97,20.07 34.62,10.41 34.62,7.62 35.79,6.46 PRESSURE.P$3 I2C_3V.P$3 49.48,2.65 54.42,2.65 59.45,7.68 U1.6
  Bottom 0.2: v26.24,28.19 26.5,28.19 27.13,28.83 v28.28,28.83 | MS1.17 v17.1,20.07
SENSOR1
  Top 0.2: R9.2 MS1.8
  Bottom 0.2: MS1.8 32.09,30.99 30.82,29.72 30.82,14.73 29.04,12.95 29.04,7.49 30.07,6.46 ANALOG1.P$3
SENSOR2
  Top 0.2: R16.2 MS1.9
  Bottom 0.2: MS1.9 29.55,27.69 28.28,26.42 28.28,19.18 26.24,17.14 26.24,7.87 24.83,6.46 ANALOG2.P$3
SHIFT_CLK  (via drill 0.35)
  Top 0.2: v27,20.07 27.89,19.18 48.09,19.18 58.29,8.98 U1.4
  Bottom 0.2: MS1.23 v27,20.07
SHIFT_DATA  (via drill 0.35)
  Top 0.2: U1.1 51.44,21.21 v29.55,21.21
  Bottom 0.2: MS1.24 v29.55,21.21
SHIFT_LATCH  (via drill 0.35)
  Top 0.2: v25.1,21.21 27.89,21.21 28.91,20.19 48.85,20.19 59.42,9.63 U1.3
  Bottom 0.2: MS1.21 21.93,22.48 23.2,21.21 v25.1,21.21
SHUTDOWN  (via drill 0.35)
  Top 0.2: Q3.1 42.04,40.28 R6.1 39.78,45.64 MS1.5 | Q2.1 46.82,67.42 v46.82,66.29 | Q1.1 60.51,32.16 59.14,33.53 v59.14,37.97
  Bottom 0.2: v46.82,66.29 46.82,52.83 MS1.5 39.7,42.67 43.13,39.24 57.87,39.24 v59.14,37.97
T_DATA
  Top 0.254: U1.20 71.2,10.93 75.52,15.24 75.52,45.72 78.06,48.26 85.81,48.26 86.69,49.15 TPIC0.3
T_DATA1
  Top 0.2: TPIC1.3 TPIC0.18
T_DATA2
  Top 0.2: TPIC2.3 TPIC1.18
T_DATA3
  Top 0.2: TPIC3.3 TPIC2.18
T_RCK  (via drill 0.35)
  Top 0.254: U1.18 72.06,9.63 v72.09,9.65 | v79.07,44.2 TPIC0.12 | v79.07,31.37 TPIC1.12 | v79.07,17.65 TPIC2.12 | v79.07,7.24 TPIC3.12
  Bottom 0.254: v79.07,44.2 v79.07,31.37 v79.07,17.65 v79.07,7.24 76.66,9.65 v72.09,9.65
T_SCK  (via drill 0.35)
  Top 0.254: U1.17 71.11,8.98 v71.2,8.89 | v80.34,44.2 TPIC0.13 | v80.34,31.37 TPIC1.13 | v80.34,17.65 TPIC2.13 | v80.34,4.57 TPIC3.13
  Bottom 0.254: 80.34,5.33 79.84,5.84 78.19,5.84 75.14,8.89 v71.2,8.89 | 80.34,5.33 v80.34,4.57 | 80.34,5.33 v80.34,17.65 v80.34,31.37 v80.34,44.2
TPIC0_4
  Top 0.254: TPIC0.14 81.74,42.16 82.25,42.67 82.25,43.43 87.58,48.77 94.44,48.77 94.44,49.02 95.71,50.29 96.73,50.29 U$5.4
TPIC0_5
  Top 0.254: TPIC0.15 83.01,42.16 83.52,42.67 83.52,43.43 88.35,48.26 96.73,48.26 96.73,48.51 U$5.5
TPIC0_6
  Top 0.254: TPIC0.16 84.28,42.16 84.79,42.67 84.79,43.43 87.84,46.48 96.73,46.48 U$5.6
TPIC0_7
  Top 0.254: TPIC0.17 85.55,42.16 86.06,42.67 86.06,43.43 87.08,44.45 96.73,44.45 U$5.7
WAKE_NOSLEEP
  Top 0.2: SWITCH.2 10.84,64.39 12.78,64.39 13.36,64.96 P_MOS.1 14.48,66.8 15.58,66.8 17.35,65.02 17.35,56.77 20.78,53.34 25.35,53.34 26.37,52.32 26.37,46.35 MS1.10
(copper drawn outside any net)
  shapes: Top area x2

## Text on the board
tPlace: ANALOG GND +3V | SCL SDA GND +3V